# Altium PCB ArgoFCRev2.PcbDoc (part 4 of 6)
Units mm, origin at the board's own origin, x right, y up, seen from the top; angles counter-clockwise.
Board outline 140.21 x 119.63 mm, 4 copper layers (Top Layer, GND Plane, PWR Plane, Bottom Layer), stack 0.603 mm thick; 413 components, 223 nets, 1421 pads, 793 vias.
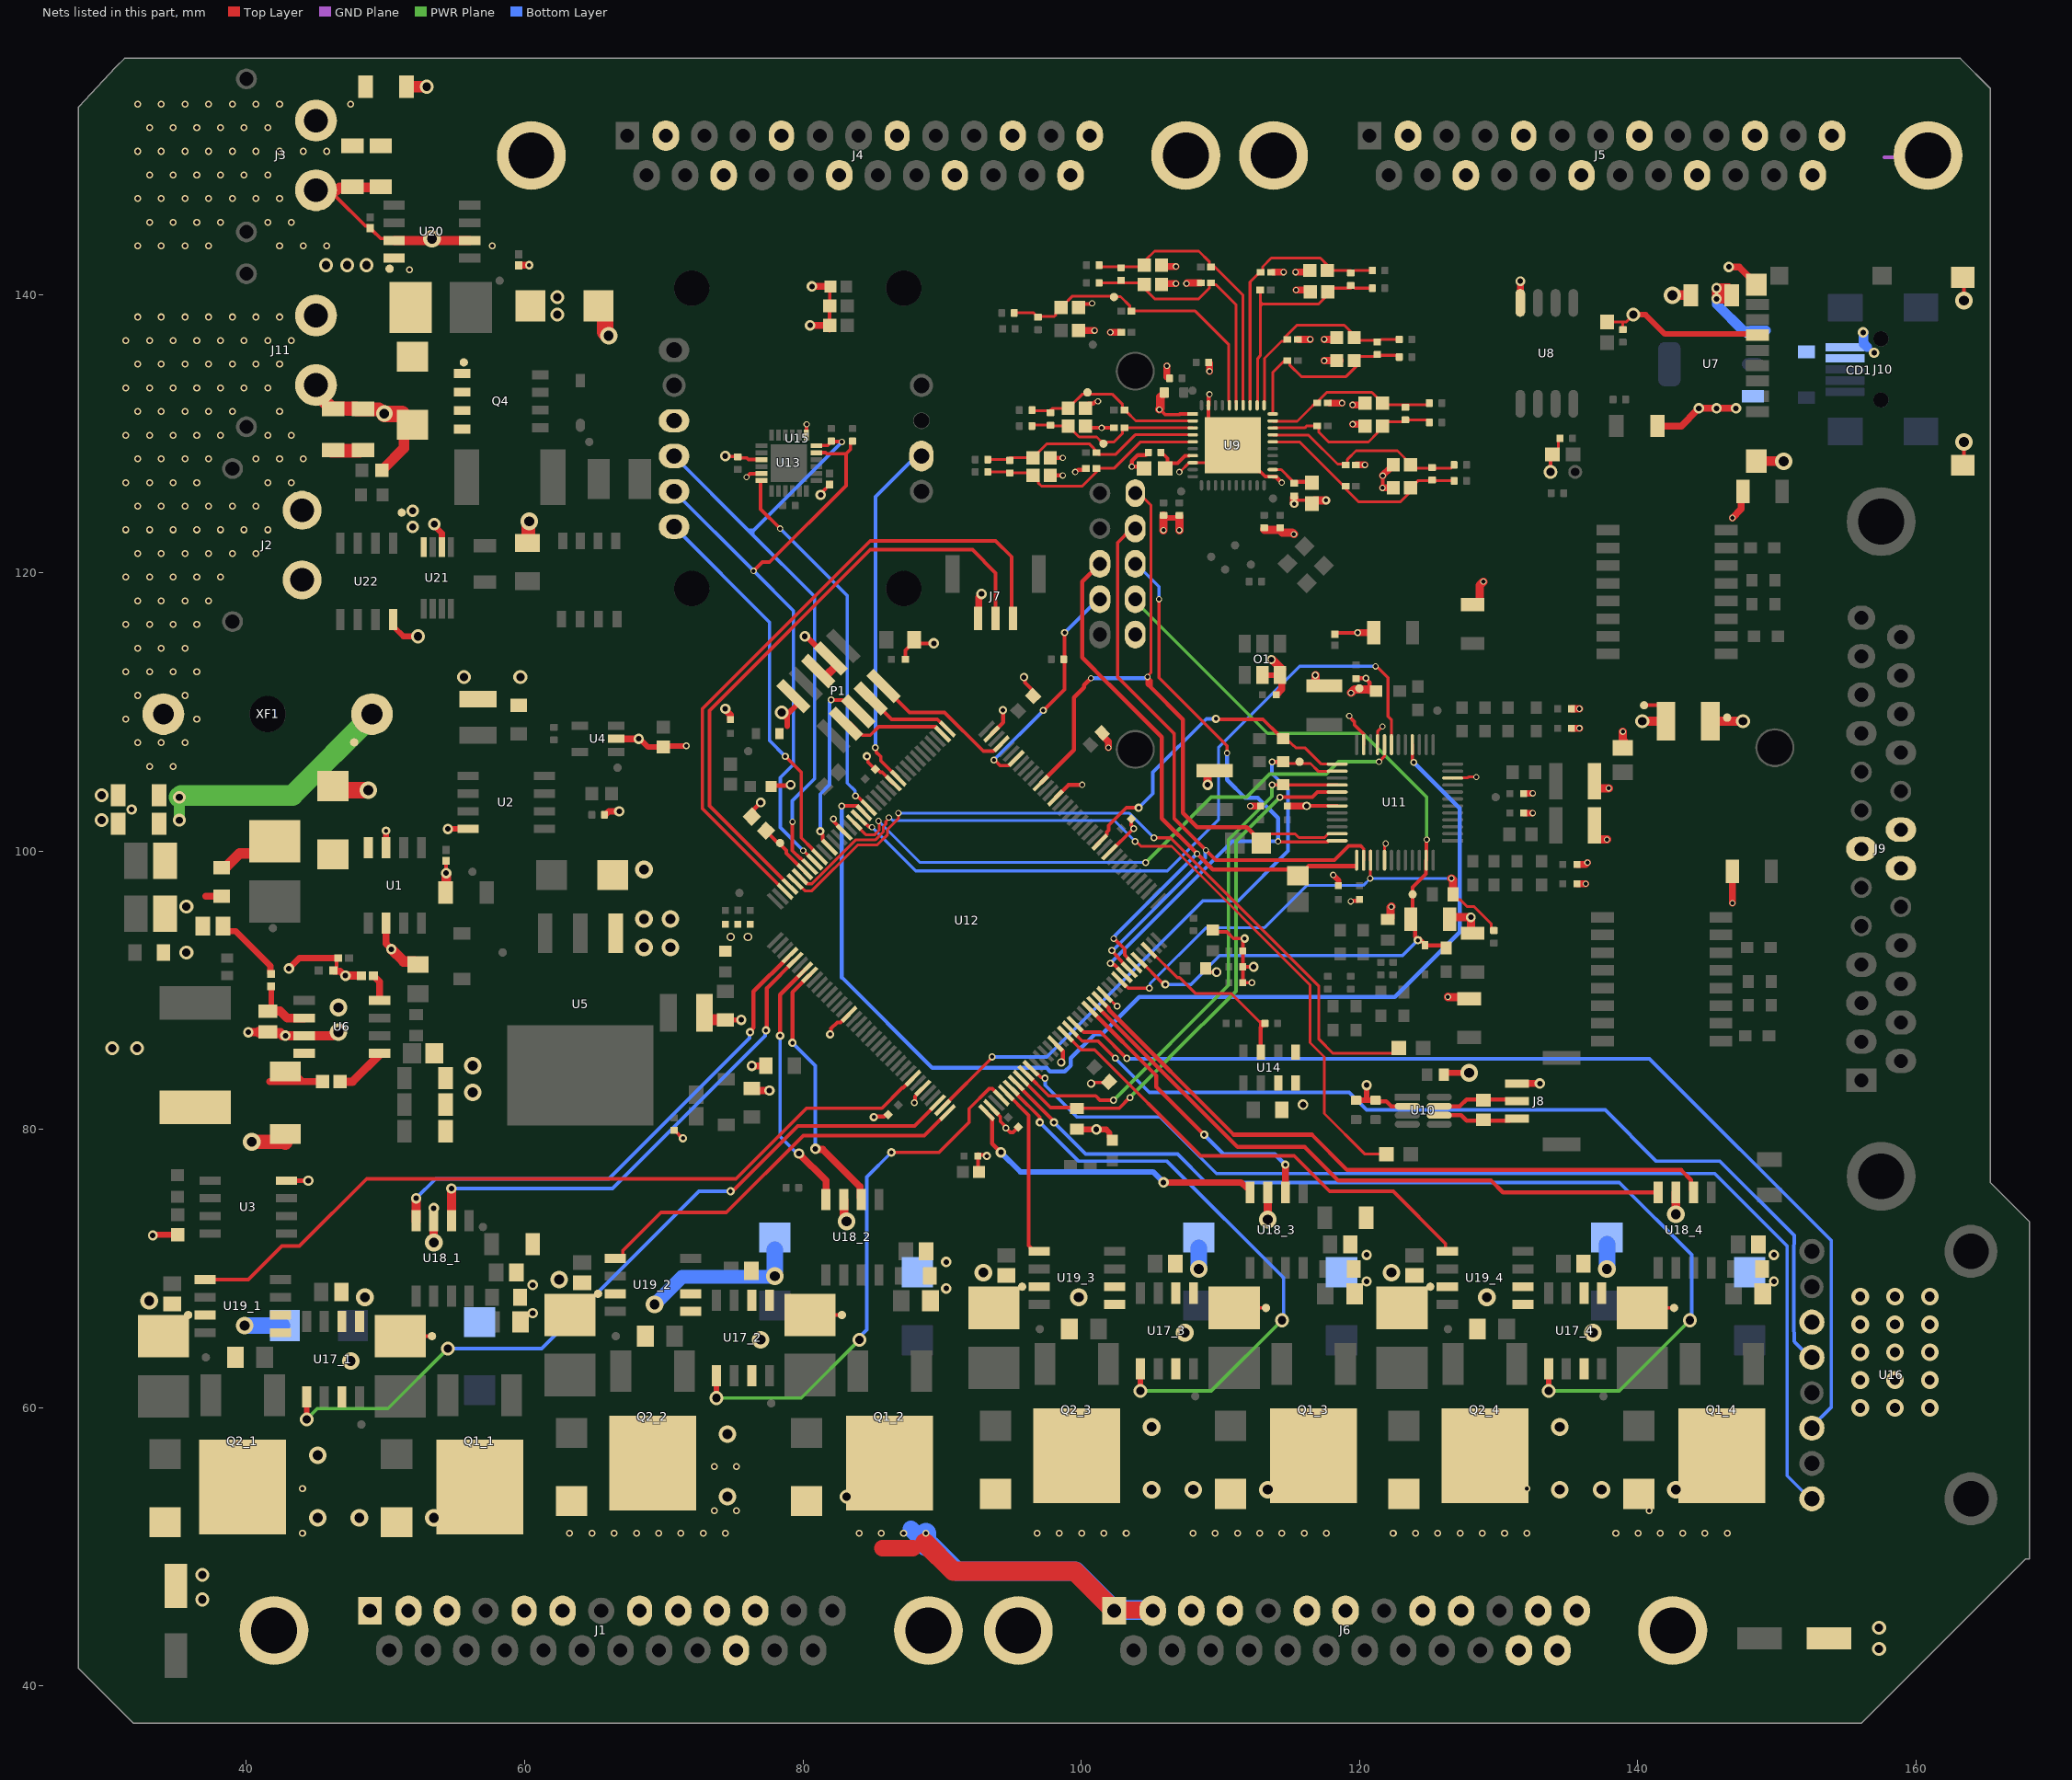
[diagram p5: the nets of this part, all layers, seen from the top]

## Via types
v1: diameter 0.5, hole 0.3, Top Layer to Bottom Layer, 278 vias
v2: diameter 0.45, hole 0.3, Top Layer to Bottom Layer, 146 vias
v3: diameter 0.75, hole 0.4, Top Layer to Bottom Layer, 103 vias
v4: diameter 1.27, hole 0.711, Top Layer to Bottom Layer, 101 vias
v5: diameter 1, hole 0.6, Top Layer to Bottom Layer, 86 vias
v6: diameter 0.6, hole 0.3, Top Layer to Bottom Layer, 31 vias
v7: diameter 0.7, hole 0.4, Top Layer to Bottom Layer, 19 vias
v8: diameter 0.6, hole 0.35, Top Layer to Bottom Layer, 8 vias
v9: diameter 0.9, hole 0.5, Top Layer to Bottom Layer, 7 vias
v10: diameter 0.6, hole 0.4, Top Layer to Bottom Layer, 4 vias
v11: diameter 3.3, hole 3.3, Top Layer to Bottom Layer, 4 vias
v12: diameter 0.65, hole 0.4, Top Layer to Bottom Layer, 2 vias
v13: diameter 0.75, hole 0.45, Top Layer to Bottom Layer, 1 vias
v14: diameter 1.2, hole 0.7, Top Layer to Bottom Layer, 1 vias
v15: diameter 1, hole 0.711, Top Layer to Bottom Layer, 1 vias
v16: diameter 3.2, hole 3.2, Top Layer to Bottom Layer, 1 vias

## Nets (pads, with @x,y where several pads share a name; then routed paths per layer and width w, separated by ;. In a path a pad name is that pad's centre, name@x,y a point inside that pad or via, vN(x,y) a via of type N, cw(c..) or ccw(c..) an arc to the next point about the centre after c; other vN are vias at no path point) (continued)
ALT_SDA: R100.1 U12.70 U14.7 | length 13.9
  Top Layer w0.2: U12.70@104.873,92.887 104.944,92.887 106.914,90.917 107.076,90.917 108.204,89.789 110.773,89.789 112.817,87.745 113.065,87.745 113.067,87.743 R100.1@113.067,87.495
  Top Layer w0.254: 112.903,86.868 112.903,87.63
  Top Layer w0.28: U14.7@112.903,85.166 112.903,87.331 113.067,87.495 R100.1@113.232,87.495
BMP_INT: U12.46 U16.8 | length 78.2
  Top Layer w0.254: U12.46@96.828,84.02 97.108,83.74 97.362,83.74 v1(97.409,83.693)
  Bottom Layer w0.254: v1(97.409,83.693) 97.409,83.185 99.695,80.899 105.664,80.899 109.728,76.835 145.542,76.835 150.749,71.628 150.749,55.118 U16.8@152.4,53.467
BNO_INT: U12.119 U15.9 | length 25.6
  Top Layer w0.254: v1(85.217,107.442) 85.264,107.395 85.264,107.141 85.598,106.807 85.598,106.505 U12.119@86.859,105.245
  Bottom Layer w0.254: v1(85.217,107.442) 85.217,125.476 U15.9@88.519,128.778
BNO_RST: U12.135 U15.6 | length 28.2
  Top Layer w0.254: v1(78.74,106.807) 78.757,106.807 79.883,105.681 79.883,100.965 80.701,100.147 80.701,100.121 U12.135@81.283,99.539
  Bottom Layer w0.254: U15.6@70.739,123.317 77.597,116.459 77.597,107.95 v1(78.74,106.807)
CANH: J8.2 R49.1 U10.7 | length 6.2
  Top Layer w0.3: U10.7@125.745,81.676 127.204,81.676 127.697,82.169 J8.2@131.744,82.169
CANL: J8.1 R49.2 U10.6 | length 5.2
  Top Layer w0.3: U10.6@125.745,81.026 127.318,81.026 127.699,80.645 J8.1@130.813,80.645
CHASSIS: C73.2 C94.2 C97.2 J9.7 J9.19 J9.20 TPC1.1 | length 6.1
  Top Layer w0.5: v2(146.812,96.266) C94.2@146.812,97.99 ; v2(146.812,123.952) 147.451,124.591 147.451,125.757 C97.2@147.701,126.007
  Top Layer w0.65: C73.2@145.608,109.347 v5(147.574,109.347)
CMD_1: U12.5 U18_1.2 | length 35.5
  Top Layer w0.28: 77.409,90.155 U12.5@79.434,92.18
  Top Layer w0.29: v6@77.409,87.122 77.409,90.155
  Top Layer w0.65: U18_1.2@54.737,73.66 v3(54.737,75.759)
  Bottom Layer w0.254: v3(54.737,75.759) 66.315,75.759 77.283,86.727 77.283,87.062 v6(77.343,87.122)
CMD_2: U12.4 U18_1.4 | length 37.3
  Top Layer w0.3: v6(76.2,86.995) 76.2,87.067 76.454,87.321 76.454,89.916 U12.4@78.912,92.374
  Top Layer w0.65: U18_1.4@52.197,73.406 U18_1.4@52.197,73.451 v3(52.197,75.057)
  Bottom Layer w0.254: v3(52.197,75.057) 53.601,76.461 66.047,76.461 76.163,86.577 76.163,86.958 v6(76.2,86.995)
CMD_3: U12.8 U18_2.2 | length 18.8
  Top Layer w0.3: v6@79.248,86.36 79.248,89.873 U12.8@80.495,91.119
  Top Layer w0.5: v3(80.899,78.613) 80.94,78.572 81.448,78.572 84.126,75.894 84.126,75.132 U18_2.2@84.201,75.057
  Bottom Layer w0.254: v6(79.248,86.233) 80.899,84.582 v3(80.899,78.613)
CMD_4: U12.7 U18_2.4 | length 18.1
  Top Layer w0.3: v6@78.359,86.868 78.359,89.691 U12.7@80.141,91.473
  Top Layer w0.5: v3(79.716,78.272) 81.661,76.327 U18_2.4@81.661,75.438
  Bottom Layer w0.254: v6(78.359,86.741) 78.359,79.502 79.589,78.272 v3(79.716,78.272)
CMD_5: U12.58 U18_3.2 | length 20.8
  Top Layer w0.3: U12.58@100.63,88.645 105.41,83.865 105.41,83.058 v6(108.839,79.629)
  Top Layer w0.5: U18_3.2@114.681,75.819 v6(114.681,77.47)
  Bottom Layer w0.3: v6(108.839,79.629) 110.236,78.232 113.919,78.232 v6(114.681,77.47)
CMD_6: U12.37 U18_3.4 | length 22.1
  Top Layer w0.2: U18_3.4@112.059,75.565 U18_3.4@112.141,75.483
  Top Layer w0.3: U12.37@93.206,81.22 93.621,80.804 93.599,80.782 93.599,78.994 v3(94.234,78.359)
  Top Layer w0.45: v3(105.918,76.2) 111.506,76.2 U18_3.4@111.887,75.819
  Bottom Layer w0.4: v3(94.234,78.359) 95.631,76.962 105.156,76.962 v3(105.918,76.2)
CMD_7: U12.60 U18_4.2 | length 48.9
  Top Layer w0.3: U12.60@101.337,89.352 101.983,88.706 101.983,88.614 110.968,79.629 116.586,79.629 119.126,77.089 143.129,77.089 143.843,76.375 143.843,75.658 U18_4.2@144.018,75.483
CMD_8: U12.59 U18_4.4 | length 46.1
  Top Layer w0.3: U12.59@100.984,88.998 111.242,78.74 116.078,78.74 118.491,76.327 129.475,76.327 130.319,75.483 U18_4.4@141.478,75.483
ETH_CRS_DV: R60.1 U11.25 U12.85 | length 23.6
  Top Layer w0.2: R60.1@114.236,108.377 114.251,108.362 114.484,108.362 115.285,107.561 115.313,107.561 115.432,107.442 116.078,107.442 117.265,106.255 U11.25@118.404,106.255
  Top Layer w0.254: U12.85@101.092,100.457 101.838,101.203 101.838,101.367 101.981,101.51 101.981,101.854 103.251,103.124 104.136,103.124 v6(104.14,103.127) ; v6(109.685,109.517) 109.728,109.474 113.068,109.474 114.197,108.345 R60.1@114.197,108.307
  Bottom Layer w0.254: v6(104.14,103.127) 104.143,103.127 105.156,104.14 105.156,105.664 109.004,109.512 109.679,109.512 v6(109.685,109.517)
ETH_CS: R52.2 R86.1 U11.39 U12.64 | length 34
  Top Layer w0.2: v2(120.777,98.044) U11.39@120.777,98.679 ; R52.2@126.619,97.155 126.619,96.923 127.034,96.508 127.266,96.508 127.762,96.012 128.25,96.012 129.492,94.77 129.492,94.409 R86.1@129.54,94.361
  Top Layer w0.25: U11.39@120.801,99.984 120.801,99.357 U11.39@120.805,99.354
  Top Layer w0.254: U12.64@103.062,90.424 103.126,90.424 103.39,90.16 v1(104.902,90.16)
  Top Layer w0.6: v2(126.619,98.044) 126.734,97.929 R52.2@126.734,97.101 ; R52.2@126.734,96.901 R52.2@126.734,97.155
  Bottom Layer w0.2: v1(104.902,90.16) 104.959,90.217 104.959,90.481 108.966,94.488 113.157,94.488 116.205,97.536 120.269,97.536 v2(120.777,98.044) v2(126.619,98.044)
ETH_CS2: pad.CS R88.1 U12.102 | length 16.9
  Top Layer w0.254: v1(93.726,106.553) 93.793,106.553 94.188,106.158 94.794,106.158 95.295,106.659 U12.102@95.327,106.659 ; v1(97.282,110.109) 98.806,111.633 v1(98.806,115.697)
  Bottom Layer w0.254: v1(93.726,106.553) v1(97.282,110.109) ; v1(98.806,115.697) 101.219,118.11 pad.CS@101.346,118.11 pad.CS@101.473,118.11
ETH_INT: pad.INT R53.1 U11.35 U12.97 | length 50.9
  Top Layer w0.2: pad.INT@104.145,125.725 105.029,124.841 105.029,112.844 104.775,112.59 v2(104.775,112.522) ; R53.1@113.293,100.838 113.293,100.979 113.55,101.236 115.399,101.236 115.65,100.985 117.499,100.985 117.756,101.242 118.39,101.242 U11.35@118.404,101.255
  Top Layer w0.25: v2(104.775,112.522) 105.029,112.268 105.029,111.76
  Top Layer w0.3: U12.97@97.095,104.891 99.492,107.288 99.492,111.049 100.21,111.767 100.21,111.931 v2(100.711,112.432) ; v2(104.775,112.522) 104.775,112.014 105.029,111.76 ; 105.026,111.757 107.315,109.468 107.315,102.743 108.342,101.716 111.907,101.716 112.921,100.702 R53.1@113.293,100.702
  Bottom Layer w0.3: v2(100.711,112.432) 104.644,112.432 104.734,112.522 v2(104.775,112.522)
ETH_MISO: pad.MISO U11.38 U12.66 | length 50.9
  Top Layer w0.25: pad.MISO@104.013,123.19 pad.MISO@103.886,123.19 103.636,123.19 102.616,122.17 102.616,112.522 106.608,108.53 106.681,108.457 106.681,102.488 106.681,102.361 109.683,99.359 118.205,99.359 119.231,100.386 120.086,100.386 120.305,100.167 U11.38@120.305,99.354
  Top Layer w0.254: v1(102.208,92.864) 103.043,91.921 U12.66@103.124,91.821
  Bottom Layer w0.254: v1(102.208,92.864) 102.275,92.864 108.928,99.518 108.928,100.038 v2(108.966,100.076)
ETH_MOSI: pad.MOSI R59.1 U11.37 U12.67 | length 48
  Top Layer w0.254: v2(102.342,93.712) 102.376,93.712 103.124,92.964 103.124,92.547 U12.67@103.378,92.293
  Top Layer w0.3: pad.MOSI@101.346,120.65 100.076,119.38 100.076,113.919 101.981,112.014 ; 101.983,112.012 101.984,112.011 105.791,108.204 105.791,102.613 105.791,102.489 105.791,102.362 v2(108.331,99.822) 109.474,98.679 R59.1@116.092,98.679 ; R59.1@115.57,98.232 115.645,98.232 R59.1@116.092,98.679 ; U11.37@119.776,98.933 116.346,98.933 R59.1@116.092,98.679
  Bottom Layer w0.254: v2(102.342,93.712) 102.342,93.765 102.44,93.863 102.44,93.931 v2(108.331,99.822)
ETH_REF_CLK: R73.2 TP23.1 U11.26 U12.35 | length 44.6
  Top Layer w0.2: R73.2@114.33,106.299 116.487,106.299 117.031,105.755 U11.26@118.404,105.755
  Top Layer w0.254: U12.35@90.041,81.573 90.041,81.606 93.599,85.164 v1(93.599,85.217)
  Top Layer w0.3: v1@113.665,106.426 R73.2@114.515,106.426
  Bottom Layer w0.254: v1(93.599,85.217) 97.536,85.217 108.756,96.437 111.296,96.437 114.877,100.018 114.877,104.429 113.715,105.591 v1(113.715,106.426)
ETH_RST: C78.2 D8.1 pad.RST R51.2 TP21.1 U11.47 U12.68 | length 61.2
  Top Layer w0.254: U12.68@104.14,92.202 104.176,92.202 105.954,90.424 v6(106.045,90.424)
  Top Layer w0.26: C78.2@123.825,95.758 TP21.1@123.825,96.901 123.825,97.419 124.776,98.37 ; U11.47@124.805,99.354 v2@124.805,100.874
  Top Layer w0.28: 124.776,98.37 U11.47@124.776,99.325
  Top Layer w0.3: C78.2@123.695,95.123 124.02,94.798 124.02,93.866 124.206,93.68 v6(124.206,93.599) ; v6@124.324,93.717 124.639,93.402 124.641,93.4 D8.1@124.714,93.4 ; D8.1@124.714,93.257 124.753,93.218 R51.2@125.868,93.218 ; v2(124.841,100.838) 124.805,100.874 124.808,100.874 v2@124.841,100.907 ; R51.2@126.122,93.218 R51.2@126.365,93.218
  PWR Plane w0.22: pad.RST@103.886,117.983 113.411,108.458 120.269,108.458
  PWR Plane w0.24: 120.269,108.458 124.841,103.886 v2(124.841,100.838)
  Bottom Layer w0.254: v6(106.045,90.424) 107.884,90.424 109.962,92.503 123.11,92.503 v6(124.206,93.599)
ETH_RXD0: R65.2 U11.29 U12.44 | length 39.4
  Top Layer w0.254: U12.44@95.681,83.695 97.794,81.581 99.648,81.581 99.695,81.534 101.428,81.534 101.432,81.531 102.74,81.531 v1(103.505,82.296) ; v1(114.3,103.886) 116.616,103.886 116.985,104.255 U11.29@118.404,104.255
  PWR Plane w0.254: v1(103.505,82.296) 106.316,85.107 106.316,85.14 111.125,89.949 111.125,100.711 v1(114.3,103.886)
ETH_RXD1: R64.2 U11.28 U12.45 | length 39.2
  Top Layer w0.24: v1(113.715,104.775) R64.2@114.515,104.775 114.535,104.755 U11.28@118.404,104.755
  Top Layer w0.254: U12.45@96.034,84.048 97.659,82.423 101.04,82.423 101.355,82.108 v1(102.337,82.108)
  PWR Plane w0.24: v1(102.337,82.108) 110.597,90.367 110.597,100.818 113.715,103.936 v1(113.715,104.775)
ETH_SCLK: pad.SCK U11.36 U12.65 | length 45.9
  Top Layer w0.22: v2(105.591,118.11) 105.591,112.468 110.49,107.569 v2(110.49,107.061)
  Top Layer w0.25: v2(114.156,100.711) 114.21,100.711 114.261,100.66 117.683,100.66 117.778,100.755 U11.36@118.404,100.755
  Top Layer w0.254: v1@102.108,91.834 102.175,91.901 102.222,91.901 102.302,91.821 102.404,91.821 U12.65@103.105,91.119
  Bottom Layer w0.22: pad.SCK@104.092,120.523 105.591,119.024 v2(105.591,118.11)
  Bottom Layer w0.254: v1(102.108,91.948) 110.871,100.711 v2(114.156,100.711)
  Bottom Layer w0.3: v2(110.49,107.061) 110.49,105.127 111.791,103.826 112.709,103.826 114.156,102.379 v2(114.156,100.711)
ETH_TX_EN: U11.16 U12.126 | length 81
  Top Layer w0.24: U11.16@123.805,107.656 123.806,106.56 123.911,106.455 v1(123.911,106.385)
  Top Layer w0.254: v1(82.804,103.251) 82.824,103.271 83.927,103.271 U12.126@84.185,103.013 ; U12.126@84.384,102.77 U12.126@84.799,102.354
  Bottom Layer w0.3: v1(82.804,103.251) 82.804,90.932 89.312,84.424 97.527,84.424 97.775,84.176 98.831,84.176 99.245,84.59 99.245,85.122 100.986,86.863 101.503,86.863 104.175,89.535 122.555,89.535 127.219,94.199 127.219,103.076 v1(123.911,106.385)
ETH_TXD0: U11.20 U12.128 | length 44.3
  Top Layer w0.2: U12.128@83.677,102.03 84.513,101.194 85.172,101.194 85.488,101.51 85.488,101.944 85.486,101.947 85.486,102.123 v2(85.438,102.171) ; v2(121.412,106.426) 121.793,106.807 121.793,106.999 121.797,107.003 121.797,107.311 U11.20@121.793,107.315
  Top Layer w0.254: U12.128@83.677,102.03 U12.128@83.677,102.063
  PWR Plane w0.254: v1(104.648,99.187) 109.347,103.886 111.887,103.886 113.538,105.537 117.604,105.537 118.493,106.426 v2(121.412,106.426)
  Bottom Layer w0.2: v2(85.438,102.171) 88.422,99.187 v1(104.648,99.187)
ETH_TXD1: U11.19 U12.127 | length 53.4
  Top Layer w0.22: v2(121.158,113.284) 121.22,113.284 122.047,112.457 122.047,109.692 122.305,109.434 U11.19@122.305,107.656
  Top Layer w0.254: U12.127@84.475,102.001 84.478,102.001 84.714,101.765 84.925,101.765 v2(84.963,101.727)
  Bottom Layer w0.22: v2(84.963,101.727) 88.103,98.587 106.207,98.587 109.872,102.252 109.872,106.897 109.872,107.459 115.697,113.284 v2(121.158,113.284)
EXT_I2C_SCL_3.3V: U12.54 U16.4 | length 66.9
  Top Layer w0.254: U12.54@99.568,86.868 100.076,86.36 101.219,86.36 v1(102.444,85.135)
  Bottom Layer w0.254: v1(102.444,85.135) 104.902,82.677 119.253,82.677 120.523,81.407 137.668,81.407 141.351,77.724 145.923,77.724 151.183,72.464 151.257,72.39 151.257,72.18 151.221,71.3 ccw(c152.527,71.247) 151.22,71.247 151.22,66.167 ccw(c152.527,66.167) 151.22,66.132 151.257,64.77 151.331,64.696 U16.4@152.4,63.627
EXT_I2C_SDA_3.3V: U12.55 U16.6 | length 74.4
  Top Layer w0.254: U12.55@99.949,87.249 100.203,86.995 101.4,86.995 v1(103.278,85.117)
  Bottom Layer w0.254: v1(103.278,85.117) 103.305,85.09 140.843,85.09 153.924,72.009 153.924,60.071 U16.6@152.4,58.547
EXT_UART_RX_3.3V: J7.2 U12.141 | length 43.7
  Top Layer w0.254: U12.141@78.994,97.536 73.279,103.251 73.279,110.109 84.836,121.666 92.185,121.666 93.853,119.998 J7.2@93.853,117.316
EXT_UART_TX_3.3V: J7.1 U12.142 | length 47.5
  Top Layer w0.254: U12.142@78.727,97.113 72.771,103.069 72.771,110.236 84.836,122.301 93.853,122.301 94.996,121.158 J7.1@94.996,116.99
FC_Batt: C137.2 C138.2 D15.1 J2.2 J11.2 Q4.5 Q4.6 Q4.7 Q4.8 TP30.1 TP32.1 U21.8 XF1.1 | length 2
  Top Layer w1: C138.2@46.101,128.778 C137.2@48.133,128.778
  other v1: 33.035,106.095 34.735,106.095 32.185,107.795 33.885,107.795 35.585,107.795 31.335,109.495 36.435,109.495 32.185,111.195 35.585,111.195 31.335,112.895 33.035,112.895 34.735,112.895 36.435,112.895 32.185,114.595 33.885,114.595 35.585,114.595 31.335,116.295 33.035,116.295 34.735,116.295 36.435,116.295 32.185,117.995 33.885,117.995 35.585,117.995 37.285,117.995 31.335,119.695 33.035,119.695 34.735,119.695 36.435,119.695 38.135,119.695 32.185,121.395 33.885,121.395 35.585,121.395 37.285,121.395 38.985,121.395 40.685,121.395 31.335,123.095 33.035,123.095 34.735,123.095 36.435,123.095 38.135,123.095 39.835,123.095 41.535,123.095 32.185,124.795 33.885,124.795 35.585,124.795 37.285,124.795 38.985,124.795 40.685,124.795 31.335,126.495 33.035,126.495 34.735,126.495 36.435,126.495 41.535,126.495 43.235,126.495 32.185,128.195 33.885,128.195 35.585,128.195 37.285,128.195 40.685,128.195 42.385,128.195 44.085,128.195 31.335,129.895 33.035,129.895 34.735,129.895 36.435,129.895 38.135,129.895 41.535,129.895 43.235,129.895 32.185,131.595 33.885,131.595 35.585,131.595 37.285,131.595 38.985,131.595 42.385,131.595 31.335,133.295 33.035,133.295 34.735,133.295 36.435,133.295 38.135,133.295 39.835,133.295 41.535,133.295 32.185,134.995 33.885,134.995 35.585,134.995 37.285,134.995 38.985,134.995 40.685,134.995 42.385,134.995 31.335,136.695 33.035,136.695 34.735,136.695 36.435,136.695 38.135,136.695 39.835,136.695 41.535,136.695 43.235,136.695 32.185,138.395 33.885,138.395 35.585,138.395 37.285,138.395 38.985,138.395 40.685,138.395 42.385,138.395
  other v9: 51.943,123.317 51.943,124.46
FDCAN2_RX: R48.1 U12.139 | length 59.5
  Top Layer w0.2: 80.645,97.663 83.81,100.828 85.231,100.828 85.788,101.385 85.788,101.778 85.963,101.953 85.963,102.132 86.179,102.348 v2(86.179,102.416) ; v1@103.936,100.711 104.3,100.347 106.502,100.347 116.459,90.39 116.459,86.233 117.475,85.217 117.475,81.153 120.396,78.232 R48.1@121.932,78.232
  Top Layer w0.254: U12.139@79.788,98.173 79.82,98.173 80.331,97.663 80.645,97.663
  Bottom Layer w0.2: v2(86.179,102.416) 86.247,102.416 86.445,102.218 102.379,102.218 v1(103.886,100.711)
FDCAN2_TX: R47.2 U12.140 | length 55.2
  Top Layer w0.2: U12.140@79.883,97.409 80.137,97.155 80.645,97.155 83.947,100.457 85.344,100.457 86.088,101.201 86.088,101.582 86.868,102.362 v2(86.868,102.743) ; v1(105.225,100.965) 106.426,100.965 117.094,90.297 117.094,86.487 118.11,85.471 R47.2@122.809,85.471
  Bottom Layer w0.2: v2(86.868,102.743) 103.447,102.743 v1(105.225,100.965)
GND: C1.1 C2.2 C3.2 C4.2 C5.2 C6.1 C7.1 C8.2 C9.2 C10.2 C11.2 C12.2 C14.2 C15.2 C16.1 C17.1 C18.2 C19.2 C20.1 C21.2 C22.2 C23.1 C24.1 C25.1 C26.2 C27.2 C28.2 C29.2 C30.2 C31.2 C32.2 C33.1 C34.1 C35.2 C37.2 C38.2 C39.2 C40.2 C41.2 C42.1 C44.2 C45.1 C47.2 C48.1 C50.2 C51.2 C52.2 C53.2 C54.2 C55.1 C57.2 C58.1 C59.2 C61.2 C62.1 C63.2 C64.2 C66.2 C67.1 C69.2 C70.2 C71.2 C72.2 C73.1 C76.2 C77.1 C78.1 C79.1 C80.2 C81.2 C82.2 C83.2 C84.2 C85.1 C86.2 C87.2 C88.1 C89.1 C90.1 C91.2 C92.2 C93.1 C95.2 C96.2 C98.2 C99.2 C100.2 C101.2 C102.2 C103.2 C104.2 C105.2 C106.2 C107.2 C108.2 C109.2 C110.2 C111.2 C112.2 C113.2 C114.2 C115.2 C116.2 C117.2 C118.2 C120.2 C121.1 C122.1 C123.1 C124.1 C125.1 C126.2 C127_1.1 C127_2.1 C127_3.1 C127_4.1 C128_1.2 C128_2.2 C128_3.2 C128_4.2 C129_1.1 C129_2.1 C129_3.1 C129_4.1 C130_1.1 C130_2.1 C130_3.1 C130_4.1 C131.1 C132.2 C133.2 C134.1 C135.1 C136.1 C137.1 C138.1 CD1.6 CD1.11 CD1.12 CD1.13 CD1.14 D1.2 D3.2 D5.2 D6.2 D9.1 D10.1 D13_1.2 D13_2.2 D13_3.2 D13_4.2 D14.2 D14_1.2 D14_2.2 D14_3.2 D14_4.2 D15.2 J1.10 J1.11 J1.23 J1.M1 J1.M2 J2.1 J3.1 J4.2 J4.5 J4.8 J4.11 J4.13 J4.16 J4.19 J4.22 J4.25 J4.M1 J4.M2 J5.2 J5.5 J5.8 J5.11 J5.13 J5.16 J5.19 J5.22 J5.25 J5.M1 J5.M2 J6.24 J6.25 J6.M1 J6.M2 J7.3 J8.3 J10.4 J10.5 J11.1 O1.2 O1.3 P1.3 P1.5 P1.9 pad.8 pad.GND R4.1 R5.1 R6.1 R7.1 R12.1 R13.1 R33.1 R34.1 R35.1 R36.1 R37.1 R38.1 R39.1 R40.1 R54.2 R61.1 R65.1 R75.1 R92.1 R102_1.1 R102_2.1 R102_3.1 R102_4.1 R103_1.1 R103_2.1 R103_3.1 R103_4.1 R104_1.1 R104_2.1 R104_3.1 R104_4.1 R105_1.1 R105_2.1 R105_3.1 R105_4.1 R111.1 TP22.1 TPG1.1 TPLA1_1.1 TPLA1_2.1 TPLA1_3.1 TPLA1_4.1 TPLB1_1.1 TPLB1_2.1 TPLB1_3.1 TPLB1_4.1 U1.2 U1.7 U2.8 U3.8 U4.2 U5.1 U6.7 U7.1 U8.4 U9.1 U9.8 U9.21 U9.39 U9.41 U10.2 U11.10 U11.21 U11.23 U11.31 U11.41 U12.16 U12.31 U12.38 U12.51 U12.61 U12.83 U12.94 U12.107 U12.120 U12.130 U13.1 U13.9 U13.11 U14.3 U14.4 U14.5 U15.3 U16.3 U17_1.1 U17_1.2 U17_1.7 U17_2.1 U17_2.2 U17_2.7 U17_3.1 U17_3.2 U17_3.7 U17_4.1 U17_4.2 U17_4.7 U18_1.3 U18_2.3 U18_3.3 U18_4.3 U19_1.1 U19_1.2 U19_1.7 U19_2.1 U19_2.2 U19_2.7 U19_3.1 U19_3.2 U19_3.7 U19_4.1 U19_4.2 U19_4.7 U20.2 U20.7 U21.6 U22.8 | length 304.5
  Top Layer w0.2: U12.61@101.981,89.408 102.013,89.408 102.559,88.862 v1(102.583,88.862) ; v2(107.061,127.254) 107.097,127.254 107.751,127.908 U9.8@107.994,127.908 ; U9.8@108.041,127.921 109.188,127.921 U9.41@109.22,127.889 ; v2(112.158,103.251) v2@112.162,103.247 ; C82.2@112.899,103.247 C82.2@112.903,103.243 ; v8@115.943,103.243 116.197,103.243 v8(116.205,103.251) ; U11.21@121.305,107.656 121.305,108.605 v2(121.666,108.966) ; U11.41@121.805,99.354 121.812,99.361 121.812,100.409 121.887,100.484 v2(121.887,100.551) ; U11.10@126.706,105.255 126.714,105.263 127.772,105.263 127.843,105.334 v2(128.397,105.334) ; C30.2@134.112,128.778 134.149,128.778 134.295,128.924 134.295,129.538 C29.2@134.424,129.667 ; C32.2@137.795,138.037 138.938,138.037 ; C31.2@138.938,137.414 138.938,138.037 ; v5(139.7,138.557) 139.18,138.037 138.938,138.037
  Top Layer w0.24: v2(105.621,131.742) 105.678,131.742 106.035,131.385 107.068,131.385 107.104,131.421 U9.1@108.041,131.421 ; v2(119.271,109.727) 119.271,109.67 119.633,109.309 119.633,109.091 120.304,108.42 120.304,108.292 120.305,108.29 U11.23@120.305,107.656
  Top Layer w0.25: v8@116.205,103.255 U11.31@118.404,103.255
  Top Layer w0.254: R13.1@46.245,91.44 46.482,91.677 C2.2@46.482,92.329 ; J3.1@46.418,147.257 46.418,147.063 48.547,144.934 48.752,144.934 48.895,144.791 48.895,144.751 49.038,144.608 49.067,144.608 49.647,144.028 50.491,144.028 U20.7@50.628,143.891 ; R102_1.1@52.832,65.151 TPLB1_1.1@53.213,65.151 ; v3(54.356,98.425) C1.1@54.356,99.432 ; U2.8@55.474,101.6 U2.8@55.934,101.6 ; R6.1@70.822,79.883 71.33,79.375 v6(71.374,79.375) ; C111.2@74.422,94.742 C111.2@74.434,94.754 ; v3(74.422,128.397) 74.451,128.368 75.282,128.368 75.38,128.27 75.967,128.27 76.094,128.143 U13.9@76.835,128.143 ; C110.2@75.299,94.754 75.311,94.742 C110.2@75.323,94.754 ; v2(75.946,126.873) 76.2,127.127 U13.11@76.962,127.127 ; C103.2@76.077,94.742 C103.2@76.077,94.754 ; v5(78.486,109.982) 78.486,109.78 78.867,109.399 78.867,108.98 ; U13.1@80.264,129.667 v2(80.264,130.683) ; v3(81.28,125.603) 81.28,125.701 82.027,126.448 C121.1@82.027,126.488 ; C122.1@81.915,137.414 C124.1@81.915,139.085 ; C124.1@81.935,139.065 81.935,140.315 81.661,140.589 C123.1@81.975,140.589 ; v6(81.958,86.847) 82.024,86.913 82.024,87.26 82.465,87.701 82.701,87.701 83.291,88.291 U12.16@83.323,88.291 ; v1(82.204,102.323) 82.251,102.276 82.251,102.107 82.97,101.388 U12.130@82.97,101.355 ; R102_2.1@82.296,66.675 TPLB1_2.1@82.677,66.675 ; v6(84.604,106.829) 84.671,106.763 84.671,106.41 C104.2@85.19,105.891 ; C104.2@85.194,105.891 85.364,105.891 85.588,105.666 85.698,105.666 86.473,104.891 U12.120@86.505,104.891 ; C27.2@87.376,113.792 87.368,113.8 87.368,114.437 87.995,115.064 C28.2@87.995,115.189 88.249,114.935 v3(89.408,114.935) ; v1(88.011,81.915) 88.058,81.962 88.058,82.387 88.627,82.955 U12.31@88.627,82.988 ; C125.1@92.583,76.962 C108.2@92.583,78.105 ; C108.2@92.583,78.232 92.644,78.171 93.152,78.171 v6(93.218,78.105) ; U12.38@93.853,81.28 93.853,81.247 94.189,80.911 94.189,80.579 94.6,80.168 v1(94.6,80.101) 94.902,79.8 95.112,79.8 C101.2@95.477,80.164 ; v8(95.885,112.507) 95.951,112.441 95.951,112.125 96.523,111.552 C120.2@96.523,111.249 ; C67.1@100.076,139.319 v2@100.711,139.319 ; C39.2@100.457,130.429 R33.1@102.235,130.429 ; v8(100.711,83.312) 100.805,83.312 100.874,83.381 C115.2@102.047,83.381 ; U12.83@102.054,99.951 102.082,99.951 103.758,101.627 v1@103.758,101.654 ; C100.2@103.605,102.335 103.605,101.874 103.786,101.693 v1(103.786,101.627) ; C118.2@108.674,91.287 C118.2@108.954,91.567 ; C118.2@108.954,91.313 v7(109.73,91.313) ; U9.41@109.15,131.183 U9.39@109.15,131.825 ; C112.2@109.22,94.488 109.505,94.203 110.474,94.203 110.951,93.726 v6(111.752,93.726) 111.752,93.632 111.629,93.509 111.629,92.841 C102.2@111.625,92.837 ; 111.625,90.805 C106.2@111.625,91.694 ; C106.2@111.625,91.817 111.748,91.694 v7(112.395,91.694) ; C107.2@111.633,90.551 v1(112.268,90.551) ; C106.2@111.633,91.694 111.633,92.583 ; U9.41@112.649,127.508 112.649,127.438 112.814,127.273 112.884,127.273 113.236,126.921 U9.21@113.792,126.921 ; R102_3.1@112.776,67.183 TPLB1_3.1@113.157,67.183 ; v6@115.316,125.222 C54.2@116.332,125.222 ; C99.2@118.364,115.697 v1(119.888,115.697) ; v2(121.666,126.111) 121.666,126.981 v2(121.675,126.991) ; J8.3@131.191,83.312 J8.3@131.201,83.302 ; v3@132.959,83.302 v3(132.969,83.312) ; pad.8@133.731,127.381 C30.2@133.731,128.397 ; TPG1.1@140.462,110.49 C73.1@141.732,110.49 ; R102_4.1@142.113,67.183 TPLB1_4.1@142.494,67.183 ; CD1.11@163.255,141.043 163.449,140.849 v4(163.449,139.573) ; CD1.12@163.449,127.635 v4@163.449,129.667
  Top Layer w0.3: R92.1@76.339,102.477 76.339,102.882 v7(76.962,103.505) ; v6(85.09,80.899) 85.124,80.933 85.84,80.933 85.961,81.053 C109.2@85.979,81.053 ; U12.107@93.559,108.427 94.381,109.248 v8(94.381,110.14) ; C42.1@97.455,127.945 C42.1@97.78,128.27 v2(98.679,128.27) ; C44.2@97.78,127 v2(98.679,127) ; U12.51@98.155,86.17 98.679,85.646 98.679,85.025 98.562,84.907 v8(98.562,84.826) ; U12.94@98.155,103.83 99.1,104.775 v2(100.076,104.775) ; v2(99.568,127.254) 99.609,127.254 99.776,127.422 100.3,127.422 R34.1@100.386,127.508 ; C35.2@100.303,131.953 100.501,132.151 100.868,132.151 101.023,132.305 101.178,132.305 v2(101.207,132.334) ; C51.2@104.708,128.524 104.642,128.458 104.062,128.458 103.632,128.028 v2(103.632,127.635) 104.66,127.635 C52.2@104.787,127.508 ; U9.39@109.15,132.047 109.18,132.077 109.18,132.762 109.22,132.801 v2(109.22,132.842) ; U9.21@113.792,126.921 113.998,126.921 v2(114.427,126.492) ; v2(119.38,96.393) 119.421,96.393 119.456,96.428 119.915,96.428 C83.2@120.015,96.528 ; C87.2@119.693,112.395 119.718,112.42 120.449,112.42 v1(120.474,112.444) ; v1@120.474,112.395 120.474,112.39 120.723,112.141 120.723,111.606 ; 120.65,111.637 121.066,111.637 R61.1@121.197,111.506 ; C70.2@121.176,82.024 121.938,82.024 122.286,81.676 U10.2@123.444,81.676
  Top Layer w0.35: U3.8@43.434,76.327 v3@44.196,76.327 ; C10.2@74.803,87.884 v3@75.311,87.884 ; D9.1@77.712,104.648 77.776,104.712 79.057,104.712 v7(79.121,104.775)
  Top Layer w0.4: U22.8@50.546,116.64 50.646,116.54 50.646,116.08 51.283,115.443 v5(52.324,115.443) ; v3@54.356,101.6 U2.8@55.499,101.6 ; v3(68.199,108.077) 68.294,108.077 68.882,107.489 R7.1@69.977,107.489 70.038,107.55 71.609,107.55 v1(71.628,107.569) ; 78.867,108.98 78.867,109.812 P1.9@79.569,110.514 ; v3(80.137,115.443) 80.232,115.443 81.832,113.843 P1.3@82.009,113.843 P1.3@82.454,113.398 ; R65.1@99.822,80.01 101.801,80.01 102.035,79.776 102.035,79.436 D10.1@102.235,79.236 ; 106.2,123.952 C37.2@107.089,123.952 ; O1.2@113.284,112.649 O1.3@114.173,112.649 ; v2(118.11,98.298) 118.491,97.917 C86.2@118.491,97.528 ; C71.2@120.08,82.107 120.523,82.107 ; v3(120.523,83.185) 120.523,82.107 ; C70.2@121.158,82.107 120.523,82.107 ; C72.2@126.393,84.074 v4(127.889,84.074) ; v5@139.827,138.557 140.571,138.557 141.968,137.16 CD1.6@148.844,137.16
  Top Layer w0.45: v7@33.249,72.437 R5.1@35.052,72.437 ; v3(43.053,91.567) 43.815,92.329 C2.2@46.482,92.329 ; U1.7@50.038,100.248 v6(50.038,101.473) ; v9(53.519,123.496) 53.519,123.374 54.046,122.847 U21.6@54.046,121.846 ; R4.1@65.786,102.616 66.04,102.87 v3(66.802,102.87) ; C80.2@131.818,102.743 v2(132.461,102.743) ; C76.2@131.818,104.14 131.835,104.157 v2(132.461,104.157) ; C79.1@136.909,101.854 136.909,101.088 C79.1@137.159,100.838
  Top Layer w0.5: 37.084,96.774 C5.2@37.973,96.774 ; R13.1@46.245,91.44 46.295,91.39 46.718,91.39 v3@47.049,91.059 ; U1.2@50.038,94.824 50.038,93.372 50.419,92.991 v3(50.419,92.964) ; C132.2@59.817,142.113 v6(60.325,142.113) ; U4.2@66.802,108.077 v3(68.199,108.077) ; v3(74.422,110.236) 74.422,110.168 74.803,109.787 C105.2@74.803,109.466 ; v3(76.327,84.582) C113.2@77.334,84.582 ; C8.2@76.835,82.804 v3(77.597,82.804) ; v3(80.518,137.795) C122.1@81.661,137.795 ; v3(80.645,140.589) C123.1@81.661,140.589 ; J7.3@92.583,116.713 92.653,116.783 92.653,118.239 92.837,118.423 v3(92.837,118.491) ; C69.2@99.939,137.287 99.939,137.316 100.037,137.414 v2(100.958,137.414) ; C39.2@100.32,130.556 C39.2@100.447,130.429 ; C114.2@101.463,108.585 101.463,108.378 101.96,107.88 v2(101.96,107.443) ; v2(102.108,137.287) R40.1@102.831,137.287 ; C66.2@105.781,140.843 105.825,140.799 v2(106.807,140.799) ; C62.1@105.781,142.113 105.864,142.03 v2(106.807,142.03) ; C59.2@106.172,134.089 v2(106.172,134.874) ; v2(107.569,140.799) 107.613,140.843 R39.1@108.59,140.843 ; v2(109.22,134.493) C64.2@109.22,135.061 ; v2@112.162,103.247 C82.2@112.899,103.247 ; R38.1@113.792,141.605 v2(114.554,141.605) ; C98.2@114.046,111.252 114.427,111.633 O1.3@114.427,113.084 ; C84.2@114.808,103.243 v8@115.943,103.243 ; v2(115.413,141.605) 116.312,141.605 C61.2@116.439,141.732 ; v2(115.443,140.335) C58.1@116.205,140.335 ; R37.1@115.595,136.788 115.604,136.779 v2(116.459,136.779) ; v2(117.475,135.255) C55.1@118.618,135.255 ; v2(117.475,136.779) 118.247,136.779 C57.2@118.374,136.906 ; R36.1@117.847,132.207 v2(118.745,132.207) ; v2(119.507,132.08) C50.2@120.396,132.08 ; v2(119.524,130.686) 120.266,130.686 C48.1@120.269,130.683 ; R35.1@119.786,127.762 v2(120.396,127.762) ; v1(119.888,115.697) C90.1@121.028,115.697 ; v2(121.666,126.111) C45.1@122.314,126.111 ; v2(121.675,126.991) 121.675,126.997 C47.2@122.212,127.533 ; J8.3@131.201,83.302 v3@132.959,83.302 ; U8.4@131.572,140.335 v7(131.572,140.97) ; C95.2@135.247,108.839 v2(135.821,108.839) ; C96.2@135.247,110.236 v2(135.821,110.236) ; C91.2@135.628,97.663 v2(136.271,97.663) ; C92.2@135.628,99.06 136.271,99.06 v2(136.388,99.177) ; C25.1@141.605,130.556 143.129,130.556 v3@144.272,131.699 ; v3(144.399,131.826) v3(147.066,131.826) ; v3(146.558,141.986) 147.292,141.986 CD1.14@148.562,140.716
  Top Layer w0.6: v3(40.132,86.995) 40.138,87.001 C22.2@40.942,87.001 ; v3@47.049,91.059 C23.1@48.121,91.059 ; v4(53.467,71.882) U18_1.3@53.467,73.451 ; U18_1.3@53.467,74.041 v3(53.467,74.355) ; P1.5@81.538,112.483 P1.3@82.454,113.398 ; U18_2.3@82.931,74.975 82.956,74.95 82.956,73.762 83.131,73.587 v4(83.131,73.406) ; v2(105.621,131.742) 105.696,131.816 105.696,132.635 105.98,132.919 C63.2@105.98,132.969 ; v2(105.918,123.063) C38.2@105.918,124.109 ; v2(107.061,123.063) C37.2@107.061,124.052 ; v3(109.093,104.775) 109.093,105.619 109.268,105.794 C81.2@109.601,105.794 ; C40.2@113.157,123.123 113.182,123.098 114.275,123.098 C41.2@114.3,123.073 ; v4(113.411,73.533) U18_3.3@113.411,75.483 ; v12(113.665,113.783) 113.675,113.773 113.738,113.773 O1.3@114.427,113.084 ; C41.2@114.265,123.098 114.465,122.898 115.176,122.898 v2(115.29,122.783) ; v6(115.316,124.968) C53.2@115.316,125.409 ; C54.2@116.713,124.828 116.713,125.132 116.786,125.205 117.585,125.205 v6(117.602,125.222) ; v1(116.84,112.649) 116.84,112.065 117.015,111.89 C85.1@117.475,111.89 ; v2(119.397,111.379) 119.651,111.633 TP22.1@120,111.633 ; TP22.1@120,111.7 120.063,111.637 120.65,111.637 ; 120.723,111.606 R61.1@121.347,111.606 ; R75.1@122.174,95.111 122.247,95.184 122.247,95.958 v2(122.301,96.012) ; v2(126.365,89.535) 126.376,89.524 127.773,89.524 C89.1@127.889,89.408 ; C78.1@126.495,95.123 126.622,95.25 v7(128.016,95.25) 128.016,94.237 C88.1@128.143,94.11 ; C93.1@128.143,117.732 128.477,117.732 128.652,117.907 128.652,119.107 v2(128.915,119.37) ; C77.1@136.909,105.029 136.909,104.696 137.084,104.521 v2(137.922,104.521) ; C79.1@137.159,100.838 v2(137.795,100.838) ; v2(138.938,108.585) 138.938,107.95 R54.2@139.065,107.823 ; v4(142.748,73.914) U18_4.3@142.748,75.483
  Top Layer w0.65: v3(42.799,86.741) 46.187,86.741 46.441,86.995 v4(46.609,86.995) ; U20.7@50.628,143.891 53.045,143.891 53.172,144.018 v4(53.34,144.018) ; v4@53.508,144.018 53.635,143.891 U20.2@56.052,143.891 ; v5(140.335,109.347) C73.1@142.037,109.347
  Top Layer w0.7: C22.2@41.719,86.932 42.427,86.932 42.618,86.741 v3(42.799,86.741) ; J3.1@44.069,147.447 46.445,147.447 46.699,147.701 C135.1@48.917,147.701 ; C20.1@54.356,96.901 v3(54.356,98.425) ; v4@142.367,139.954 C24.1@143.51,139.954 ; CD1.13@148.644,128.016 148.658,128.03 150.481,128.03 v4(150.495,128.016)
  Top Layer w0.75: R111.1@49.737,127.381 49.737,127.395 49.83,127.487 49.843,127.487 51.322,128.966 51.322,130.025 D15.2@51.943,130.646 ; v3(50.419,92.964) 51.299,92.084 52.096,92.084 R12.1@52.324,91.856
  Top Layer w0.8: C22.2@40.942,86.995 41.656,86.995 C22.2@41.719,86.932 ; C136.1@51.435,154.94 v5(52.959,154.94) ; C11.2@73.025,87.884 C10.2@74.168,87.884
  Top Layer w1: v4(40.386,79.121) 42.708,79.121 D6.2@42.799,79.03 ; J11.1@45,133.5 45,132.959 45.928,132.031 45.928,131.802 45.953,131.777 C138.1@46.228,131.777 ; C138.1@46.361,131.826 47.212,131.826 47.236,131.802 47.879,131.802 47.929,131.752 49.531,131.752 49.838,131.445 v14(49.911,131.445) ; C133.2@60.198,122.174 60.273,122.249 60.273,123.646 v4(60.325,123.698)
  Top Layer w1.2: D1.2@46.228,104.685 46.519,104.394 v4(48.768,104.394) ; v14(49.911,131.445) 49.924,131.432 51.157,131.432 D15.2@51.943,130.646 ; D14.2@65.315,139.192 65.795,138.712 65.795,137.297 66.04,137.052 v4(66.04,137.033)
  GND Plane w0.254: 157.734,149.86 J5.M2@160.655,149.86
  Bottom Layer w0.7: v3(156.21,137.287) 156.22,137.277 156.22,136.511 156.499,136.231
  Bottom Layer w1: v4(69.342,67.437) 71.322,69.417 v4@77.853,69.417
  Bottom Layer w1.2: v4@40.005,65.913 D14_1.2@42.545,65.913 ; v4@77.978,69.85 D14_2.2@77.978,71.374 ; v4(108.458,69.977) D14_3.2@108.458,71.501 ; v4@137.795,70.231 D14_4.2@137.795,71.755
  other v2: 101.473,130.429 100.786,139.371
  other v3: 60.579,66.802 90.297,68.58 60.579,68.834 120.523,69.088 90.297,70.485 120.523,70.993 149.793,70.993 44.45,76.327 101.092,80.01 75.565,87.884 47.117,91.059 54.483,101.6 31.75,102.997 145.669,131.826 156.997,135.814
  other v4: 156,60 158.5,60 161,60 156,62 158.5,62 161,62 47.498,63.373 156,64 158.5,64 161,64 76.962,64.897 107.442,65.405 136.779,65.405 39.878,65.913 156,66 158.5,66 161,66 33.02,67.691 48.514,67.945 99.822,67.945 129.159,67.945 156,68 158.5,68 161,68 62.484,69.215 77.978,69.469 92.964,69.723 122.301,69.723 137.795,69.977 56.261,82.677 56.261,84.582 46.609,88.773 68.58,93.091 70.485,93.091 68.58,95.123 70.485,95.123 68.58,98.679 163.449,129.413 142.494,139.954
  other v5: 157.353,42.672 157.353,44.196 36.83,46.228 36.83,48.006 35.687,92.71 35.687,96.012 29.591,102.235 29.591,104.013 55.626,112.522 59.69,112.522
  other v7: 149.793,69.088 33.274,72.39
  other v10: 74.795,93.853 76.049,93.853
  other v13: 115.951,81.788
"GSE PWR": C134.2 C135.2 C136.2 D14.1 J3.2 R109.2 TP31.1 U20.8
  other v1: 51.735,141.795 32.185,143.495 33.885,143.495 35.585,143.495 37.285,143.495 42.385,143.495 44.085,143.495 45.785,143.495 57.685,143.495 33.035,145.195 34.735,145.195 36.435,145.195 38.135,145.195 41.535,145.195 43.235,145.195 32.185,146.895 33.885,146.895 35.585,146.895 37.285,146.895 38.985,146.895 40.685,146.895 42.385,146.895 33.035,148.595 34.735,148.595 36.435,148.595 38.135,148.595 39.835,148.595 41.535,148.595 32.185,150.295 33.885,150.295 35.585,150.295 37.285,150.295 38.985,150.295 40.685,150.295 42.385,150.295 44.085,150.295 45.785,150.295 33.035,151.995 34.735,151.995 36.435,151.995 38.135,151.995 39.835,151.995 41.535,151.995 32.185,153.695 33.885,153.695 35.585,153.695 37.285,153.695 38.985,153.695 40.685,153.695 42.385,153.695 47.485,153.695
  other v5: 62.357,138.557 62.357,139.827 45.72,142.113 47.244,142.113 48.641,142.113
IMU_INT: U12.125 U13.12 | length 26.7
  Top Layer w0.254: U13.12@77.019,126.639 76.971,126.591 76.962,126.591 76.962,124.587 v2(78.359,123.19) ; v1@83.838,104.022 83.838,104.007 83.907,103.939 83.922,103.939 U12.125@84.737,103.123
  Bottom Layer w0.254: v2(78.359,123.19) 83.185,118.364 83.185,104.902 83.746,104.341 v1@83.746,104.066
  other v1: 83.793,103.986
IMU_SCL_3.3V: R97.1 U12.136 U13.23 U15.5 | length 46.1
  Top Layer w0.254: v2(76.454,120.142) 77.089,120.777 77.597,120.777 83.096,126.276 83.096,128.562 ; v2@80.01,100.076 U12.136@80.899,99.187 ; U13.23@81.28,128.651 81.608,128.651 81.697,128.562 83.096,128.562 ; R97.1@83.566,129.413 83.483,129.413 83.418,129.348 83.418,128.884 83.096,128.562
  Bottom Layer w0.254: U15.5@70.739,125.857 v2(76.454,120.142) 79.317,117.279 79.317,106.241 78.368,105.292 78.368,101.699 v2(80.026,100.042)
IMU_SDA_3.3V: R98.1 U12.137 U13.24 U15.4 | length 46.4
  Top Layer w0.254: v2(79.248,102.108) 79.248,100.039 79.797,99.49 79.853,99.49 80.462,98.881 U12.137@80.495,98.881 ; U13.24@81.28,129.159 81.788,129.159 R98.1@82.169,129.54 ; R98.1@82.169,129.554 R98.1@82.169,129.54 ; v2(82.804,129.413) 82.775,129.442 82.19,129.442 82.169,129.463 R98.1@82.169,129.54
  Bottom Layer w0.254: U15.4@70.739,128.397 76.073,123.063 ; 76.327,123.063 76.073,123.063 ; 76.391,122.872 76.391,122.999 ; v2(79.248,102.108) 79.248,103.632 80.839,105.223 80.839,118.297 76.263,122.872 ; v2(82.804,129.413) 76.391,122.999 ; 76.073,123.063 76.263,122.872 ; 76.263,122.872 76.391,122.999
Isense1: U12.34 U17_1.5 | length 55
  Top Layer w0.254: v6@74.93,75.565 79.629,80.264 88.024,80.264 89.408,81.648 U12.34@89.408,81.661
  Top Layer w0.4: v5@44.323,59.436 U17_1.5@44.323,60.071
  PWR Plane w0.254: v5(44.323,59.182) 45.085,59.944 50.165,59.944 v5(54.483,64.262)
  Bottom Layer w0.254: v5(54.483,64.262) 61.214,64.262 72.517,75.565 v6(74.803,75.565) v6@74.93,75.565
Isense2: U12.29 U19_1.5 | length 56.9
  Top Layer w0.254: U19_1.5@37.039,69.215 40.132,69.215 42.545,71.628 43.815,71.628 48.648,76.461 75.191,76.461 80.264,81.534 85.671,81.534 87.137,83 87.192,83 U12.29@87.903,83.711
Isense3: U12.40 U17_2.5 | length 37.2
  Top Layer w0.25: v6(86.36,78.359) 89.789,78.359 91.948,80.518 91.948,81.498 93.381,82.931 93.617,82.931 93.871,82.677 U12.40@93.889,82.677
  Top Layer w0.4: v5@73.787,60.96 U17_2.5@73.787,61.595
  PWR Plane w0.254: v5(73.787,60.706) 79.883,60.706 v5(84.074,64.897)
  Bottom Layer w0.254: v5(84.074,64.897) 84.074,65.099 84.582,65.607 84.582,76.581 v6(86.36,78.359)
Isense4: U12.36 U19_2.5 | length 28.1
  Top Layer w0.254: U19_2.5@66.503,70.739 66.862,70.739 67.06,70.937 67.06,71.296 69.805,74.041 74.492,74.041 80.02,79.569 88.713,79.569 U12.36@90.17,81.026
Isense5: U12.42 U17_3.5 | length 40.9
  Top Layer w0.254: U12.42@95.377,82.55 97.028,80.899 v6(97.028,80.518)
  Top Layer w0.4: v5@104.267,61.468 U17_3.5@104.267,62.103
  PWR Plane w0.254: v5(104.267,61.214) 109.347,61.214 v5(114.427,66.294)
  Bottom Layer w0.254: v6(97.028,80.518) 99.822,77.724 106.172,77.724 114.554,69.342 114.554,66.421 v5(114.427,66.294)
Isense6: U12.41 U19_3.5 | length 12.6
  Top Layer w0.254: U12.41@94.62,82.634 94.62,82.628 96.236,81.012 96.236,71.658 96.347,71.547 96.347,71.445 96.545,71.247 U19_3.5@96.983,71.247
Isense7: U12.43 U17_4.5 | length 71
  Top Layer w0.254: U12.43@95.631,83.058 95.631,83.005 98.044,80.592 v6(98.044,80.518)
  Top Layer w0.4: v5@133.604,61.468 U17_4.5@133.604,62.103
  PWR Plane w0.254: v5(133.604,61.214) 138.684,61.214 v5(143.764,66.294)
  Bottom Layer w0.254: v6(98.044,80.518) 100.33,78.232 106.934,78.232 108.966,76.2 138.684,76.2 143.891,70.993 143.891,66.421 v5(143.764,66.294)
Isense8: U12.53 U19_4.5 | length 34.3
  Top Layer w0.254: U12.53@98.863,86.877 100.014,85.725 100.965,85.725 108.585,78.105 115.316,78.105 117.856,75.565 122.428,75.565 126.189,71.804 126.189,71.169 U19_4.5@126.238,71.12
JTCK: P1.4 U12.109 | length 6.4
  Top Layer w0.254: P1.4@84.887,110.965 86.378,109.474 89.668,109.474 90.362,108.78 U12.109@90.394,108.78
JTDI: P1.8 U12.110 | length 7.1
  Top Layer w0.254: P1.8@83.091,109.169 83.435,109.169 84.273,108.331 84.836,108.331 85.459,108.954 89.547,108.954 U12.110@89.599,108.902
JTDO: P1.6 U12.133 | length 14.3
  Top Layer w0.254: v6(81.243,101.436) 81.243,101.342 81.408,101.177 81.408,100.828 81.909,100.327 U12.133@81.909,100.295 ; v1(82.042,110.871) 82.841,110.871 84.28,109.432 P1.6@84.56,109.432
  Bottom Layer w0.254: v6(81.243,101.436) 81.243,104.103 81.915,104.775 81.915,110.677 82.042,110.804 v1(82.042,110.871)
JTMS: P1.2 U12.105 | length 10.2
  Top Layer w0.254: P1.2@85.785,111.863 87.666,109.982 90.173,109.982 92.967,107.188 93.702,107.188 93.899,107.385 U12.105@93.932,107.385
LOAD_1: D11_1.2 J1.5 J1.6 Q1_1.2
  other v4: 48.12,52.09 53.467,52.09
LOAD_2: D12_1.2 J1.1 J1.2 J1.3 Q2_1.2
  other v1: 44.035,50.995 44.035,54.195
  other v4: 45.12,52.09 45.12,56.59
LOAD_3: D11_2.2 J6.1 J6.2 Q1_2.2 | length 40.6
  Top Layer w1.2: 85.725,49.911 87.884,49.911 ; J6.1@102.38,45.466 J6.2@105.029,45.466
  Top Layer w1.4: 88.773,50.292 90.805,48.26 99.54,48.26 J6.1@102.38,45.42
  Bottom Layer w1.2: 87.757,51.308 88.452,50.613 ; J6.1@102.18,45.666 102.18,45.62 J6.1@102.334,45.466
  Bottom Layer w1.3: 88.835,50.103 89.216,50.103
  Bottom Layer w1.4: 89.216,50.103 91.059,48.26 99.586,48.26 J6.1@102.18,45.666 ; J6.1@102.334,45.466 J6.2@105.156,45.466
  Bottom Layer w1.5: 88.835,50.103 v1(88.835,50.995)
  other v1: 84.035,50.995 85.635,50.995 87.235,50.995
  other v5: 83.131,53.614
LOAD_4: D12_2.2 J1.8 J1.9 Q2_2.2
  other v1: 63.235,50.995 64.835,50.995 66.435,50.995 68.035,50.995 69.635,50.995 71.235,50.995 72.835,50.995 74.435,50.995 73.635,52.595 75.235,52.595 73.635,55.795 75.235,55.795
  other v4: 74.584,53.614 74.584,58.114
LOAD_5: D11_3.2 J6.6 J6.7 Q1_3.2
  other v1: 108.035,50.995 109.635,50.995 111.235,50.995 112.835,50.995 114.435,50.995 116.035,50.995 117.635,50.995
  other v4: 108.064,54.122 113.411,54.122
LOAD_6: D12_3.2 J6.3 J6.4 Q2_3.2
  other v1: 96.835,50.995 98.435,50.995 100.035,50.995 101.635,50.995 103.235,50.995
  other v4: 105.064,54.122 105.064,58.622
LOAD_7: D11_4.2 J6.12 J6.13 Q1_4.2
  other v1: 138.435,50.995 140.035,50.995 141.635,50.995 143.235,50.995 144.835,50.995 146.435,50.995 140.835,52.595
  other v4: 137.401,54.122 142.748,54.122
LOAD_8: D12_4.2 J6.9 J6.10 Q2_4.2
  other v1: 122.435,50.995 124.035,50.995 125.635,50.995 127.235,50.995 128.835,50.995 130.435,50.995 132.035,50.995 132.035,54.195
  other v4: 134.401,54.122 134.401,58.622
NetBoot1_1: Boot1.1 R92.2 U12.138 | length 3.8
  Top Layer w0.27: R92.2@77.595,101.221 78.293,100.523 78.341,100.523 78.341,100.519 78.804,100.056 78.804,99.864 U12.138@80.141,98.527
NetC5_1: C5.1 C6.2 C7.2 D1.1 R1.2 TP1.1 U1.8 XF1.2 | length 22.3
  Top Layer w0.75: C5.1@38.405,98.73 38.405,98.868 38.455,98.918 38.593,98.918 39.511,99.836 41.597,99.836 R1.2@41.837,100.076
  PWR Plane w0.8: v9(35.179,102.235) v9(35.179,103.886)
  PWR Plane w1: XF1.2@49.029,109.855 XF1.2@49.149,109.855
  PWR Plane w1.5: v9(35.179,103.886) 35.306,104.013 43.307,104.013 XF1.2@49.149,109.855
NetC13_1: C13.1 U6.1 | length 3.6
  Top Layer w0.6: C13.1@46.863,83.439 47.625,83.439 U6.1@49.657,85.471
NetC13_2: C13.2 D6.1 L1.1 U6.8 | length 4.3
  Top Layer w0.254: D6.1@43.815,83.82 44.196,83.439
  Top Layer w0.5: 41.681,83.439 C13.2@45.476,83.439
  other v5: 30.353,85.852 32.131,85.852
NetC22_1: C22.1 R11.2 U6.6 | length 5
  Top Layer w0.4: C22.1@41.402,88.507 41.508,88.507 41.783,88.782 R11.2@41.783,90.282
  Top Layer w0.64: C22.1@41.402,88.519 42.418,88.519 42.926,88.011 U6.6@44.151,88.011
NetC23_2: C23.2 U6.4 | length 2
  Top Layer w0.5: C23.2@49.14,91.059 49.16,91.059 49.22,90.999 49.22,90.979 49.575,90.624 U6.4@49.575,89.281
NetC24_2: C24.2 D7.2 U7.3 | length 8.2
  Top Layer w0.6: v3(145.669,140.462) v3@145.695,140.436 ; v3@145.695,139.726 v3(145.669,139.7) v3@145.698,139.729 ; C24.2@146.538,139.729 C24.2@146.763,139.954 146.763,140.208 C24.2@146.538,140.433
  Top Layer w0.7: v3@145.695,139.726 v3@145.695,140.436
  Top Layer w0.72: v3@145.698,139.729 C24.2@146.538,139.729 ; v3@145.698,140.433 C24.2@146.538,140.433
  Bottom Layer w0.7: v3(145.669,139.7) 145.679,139.69 145.679,139.309 147.653,137.335 148.254,137.335 U7.3@148.288,137.301 ; U7.3@148.209,137.414 149.225,137.414
NetC26_1: C26.1 R11.1 | length 5.3
  Top Layer w0.45: C26.1@38.318,94.615 38.318,94.559 38.62,94.257 39.22,94.257 41.722,91.755 41.722,91.245 R11.1@41.844,91.245
NetC35_1: C35.1 C36.1 R15.2 R20.1 TP13.1 U9.2 | length 13.2
  Top Layer w0.2: R15.2@96.408,131.639 C36.1@97.79,131.639 ; C36.1@97.79,131.699 97.917,131.826 C35.1@99.07,131.826 ; C35.1@98.933,132.08 99.324,132.08 100.103,132.859 100.457,132.859 102.218,132.859 102.978,132.099 102.978,131.835 102.988,131.826 R20.1@103.251,131.826 ; R20.1@103.122,131.699 103.284,131.563 103.926,130.921 U9.2@108.041,130.921
NetC36_2: C36.2 C39.1 R16.2 R33.2 TP14.1 U9.3 | length 12.6
  Top Layer w0.2: R16.2@96.468,130.614 C36.2@97.79,130.614 ; C36.2@97.79,130.556 99.06,130.556 C39.1@99.07,130.556 99.854,129.772 101.114,129.772 101.523,129.363 101.867,129.363 101.917,129.413 102.362,129.413 102.978,130.029 102.978,130.293 102.988,130.302 R33.2@103.251,130.302 ; R33.2@103.222,130.421 U9.3@108.041,130.421
NetC42_2: C42.2 C43.1 R17.2 R21.1 U9.4 | length 15.9
  Top Layer w0.2: R17.2@93.472,128.143 94.802,128.143 C43.1@94.869,128.21 ; C43.1@94.869,128.27 C42.2@96.53,128.27 97.546,129.286 100.572,129.286 R21.1@101.276,128.581 ; R21.1@101.219,128.524 102.489,128.524 103.886,129.921 U9.4@108.041,129.921
NetC43_2: C43.2 C44.1 R18.2 R34.2 U9.5 | length 16.5
  Top Layer w0.2: R18.2@93.287,127.254 94.8,127.254 C43.2@94.869,127.185 96.345,127.185 C44.1@96.53,127 ; C44.1@96.52,126.873 96.657,126.873 96.905,126.625 96.905,126.488 97.155,126.238 100.076,126.238 R34.2@101.162,127.324 ; R34.2@101.087,127.508 102.362,127.508 104.275,129.421 U9.5@108.041,129.421
NetC45_2: C45.2 C46.1 R19.2 R22.1 U9.26 | length 15.7
  Top Layer w0.2: U9.26@113.776,129.421 115.689,129.421 118.736,126.374 118.824,126.374 118.877,126.321 R22.1@118.877,126.233 ; R22.1@118.847,126.202 119.954,125.095 122.939,125.095 C45.2@123.726,125.882 ; C45.2@123.688,126.111 124.196,126.619 R19.2@126.804,126.619
  Top Layer w0.5: C45.2@123.66,125.959 C45.2@123.812,126.111
NetC46_2: C46.2 C47.1 R28.2 R35.2 U9.27 | length 14.8
  Top Layer w0.2: U9.27@113.792,129.913 114.072,129.913 114.08,129.905 116.348,129.905 118.44,127.813 R35.2@118.988,127.813 ; R35.2@119.004,127.762 119.008,127.762 119.145,127.898 119.145,128.162 119.761,128.778 122.735,128.778 123.599,127.914 C47.1@123.726,127.914 ; C47.1@123.716,127.533 126.6,127.533 126.702,127.635 R28.2@126.746,127.635
NetC48_2: C48.2 C49.1 R23.1 R29.2 U9.28 | length 13.2
  Top Layer w0.2: U9.28@113.776,130.421 116.07,130.421 116.205,130.556 R23.1@116.967,130.556 ; R23.1@116.972,130.556 117.067,130.461 117.067,130.137 117.791,129.413 120.65,129.413 121.281,130.044 121.281,130.445 C48.2@121.773,130.937 ; C48.2@121.656,130.556 121.97,130.87 C49.1@123.305,130.87 ; C49.1@123.305,130.995 124.866,130.995 124.991,130.87 R29.2@124.991,130.787
NetC49_2: C49.2 C50.1 R30.2 R36.2 U9.29 | length 12.4
  Top Layer w0.2: U9.29@113.792,130.889 115.522,130.889 116.586,131.953 ; 116.638,132.003 116.868,132.233 116.918,132.233 117.654,132.969 120.894,132.969 C50.1@121.656,132.207 ; C50.1@121.646,132.08 122.799,132.08 ; 122.859,132.08 C49.2@123.432,132.08 ; C49.2@123.305,131.895 123.49,132.08 R30.2@124.902,132.08
NetC51_1: C51.1 C52.1 U9.7 | length 3.4
  Top Layer w0.25: C51.1@105.791,128.651 105.791,128.568 105.858,128.501 105.941,128.501 106.205,128.237 C52.1@106.205,127.59 ; C52.1@106.033,127.508 106.408,127.883 106.573,127.883 106.579,127.889 106.934,127.889 107.466,128.421 U9.7@107.769,128.421
NetC53_1: C53.1 C54.1 U9.22 | length 2.8
  Top Layer w0.2: U9.22@113.776,127.421 114.387,127.421 C53.1@115.189,126.619
  Top Layer w0.3: C53.1@115.57,126.559 116.526,126.559 C54.1@116.586,126.619
NetC55_2: C55.2 C56.1 R24.1 R31.2 U9.30 | length 13.7
  Top Layer w0.2: U9.30@113.792,131.389 113.792,131.421 113.792,134.431 114.648,135.288 114.824,135.288 114.993,135.119 114.993,134.943 115.824,134.112 119.041,134.112 C55.2@119.803,134.874 ; C55.2@119.624,135.255 119.938,135.569 C56.1@121.285,135.569 ; C56.1@121.285,135.636 122.74,135.636 R31.2@122.867,135.509
NetC56_2: C56.2 C57.1 R32.2 R37.2 U9.31 | length 14.6
  Top Layer w0.2: U9.31@113.157,132.207 113.157,132.315 113.178,132.336 113.178,135.418 114.406,136.646 114.68,136.646 R37.2@114.813,136.779 ; R37.2@114.654,136.944 115.505,137.795 118.914,137.795 C57.1@119.803,136.906 ; C57.1@119.624,136.906 119.811,136.719 C56.2@121.285,136.719 ; C56.2@121.285,136.594 121.435,136.744 121.542,136.744 121.577,136.779 R32.2@122.809,136.779
NetC58_2: C58.2 C60.1 R25.1 R41.2 U9.32 | length 17.2
  Top Layer w0.2: U9.32@112.66,132.047 112.697,132.083 112.697,132.162 112.697,132.184 112.682,132.248 112.682,135.372 112.878,135.606 112.878,139.471 ; R25.1@112.878,140.335 112.878,139.471 ; 112.903,139.192 113.03,139.319 ; C58.2@117.729,140.462 C60.1@119.38,140.462 ; C58.2@117.826,140.081 117.076,139.331 113.018,139.331 112.878,139.471 ; C60.1@119.38,140.647 119.53,140.497 119.637,140.497 119.672,140.462 R41.2@120.935,140.462
NetC60_2: C60.2 C61.1 R38.2 R42.2 U9.33 | length 18.7
  Top Layer w0.2: U9.33@112.141,132.207 112.141,140.905 112.705,141.469 112.772,141.469 R38.2@112.908,141.605 112.912,141.605 113.049,141.741 113.049,142.005 113.665,142.621 117.191,142.621 C61.1@117.699,142.113 ; C61.1@117.729,141.732 C60.2@119.38,141.732 ; C60.2@119.38,141.547 119.53,141.697 119.637,141.697 119.672,141.732 R42.2@120.997,141.732
NetC62_2: C62.2 C65.1 R26.1 R43.2 U9.34 | length 19.7
  Top Layer w0.2: R43.2@101.473,141.986 104.404,141.986 C62.2@104.531,142.113 104.642,142.488 105.283,143.129 108.458,143.129 109.201,142.386 109.201,142.122 109.338,141.986 R26.1@109.342,141.986 ; R26.1@109.501,142.101 111.633,139.969 U9.34@111.633,132.334
NetC65_2: C65.2 C66.1 R39.2 R44.2 U9.35 | length 18.5
  Top Layer w0.2: R44.2@101.346,140.843 101.727,140.843 C66.1@104.531,140.843 ; C66.1@104.521,140.462 105.283,139.7 108.458,139.7 109.201,140.443 109.201,140.707 109.338,140.843 R39.2@109.342,140.843 109.478,140.707 109.701,140.707 111.121,139.287 U9.35@111.121,132.207
NetC67_2: C67.2 C68.2 R27.1 R45.2 TP18.1 U9.36 | length 21.8
  Top Layer w0.2: R45.2@95.226,138.684 96.589,138.684 96.726,138.547 96.726,138.522 96.876,138.372 C68.2@96.901,138.372 ; C68.2@96.944,138.43 98.07,138.43 98.187,138.547 98.187,138.69 98.308,138.811 C67.2@98.689,138.811 ; C67.2@98.679,139.192 99.383,139.896 102.293,139.896 TP18.1@102.396,139.793 ; TP18.1@102.362,139.827 102.392,139.857 102.84,139.857 103.486,139.211 103.486,138.825 R27.1@103.5,138.811 ; R27.1@103.505,138.811 108.204,138.811 110.617,136.398 U9.36@110.617,132.334